# Altium PCB MD1800_5V800mA.PcbDoc
Units mm, origin at the board's own origin, x right, y up, seen from the top; angles counter-clockwise.
Board outline 63.25 x 38.25 mm, 2 copper layers (Top Layer, Bottom Layer); 39 components, 30 nets, 113 pads, 7 vias.
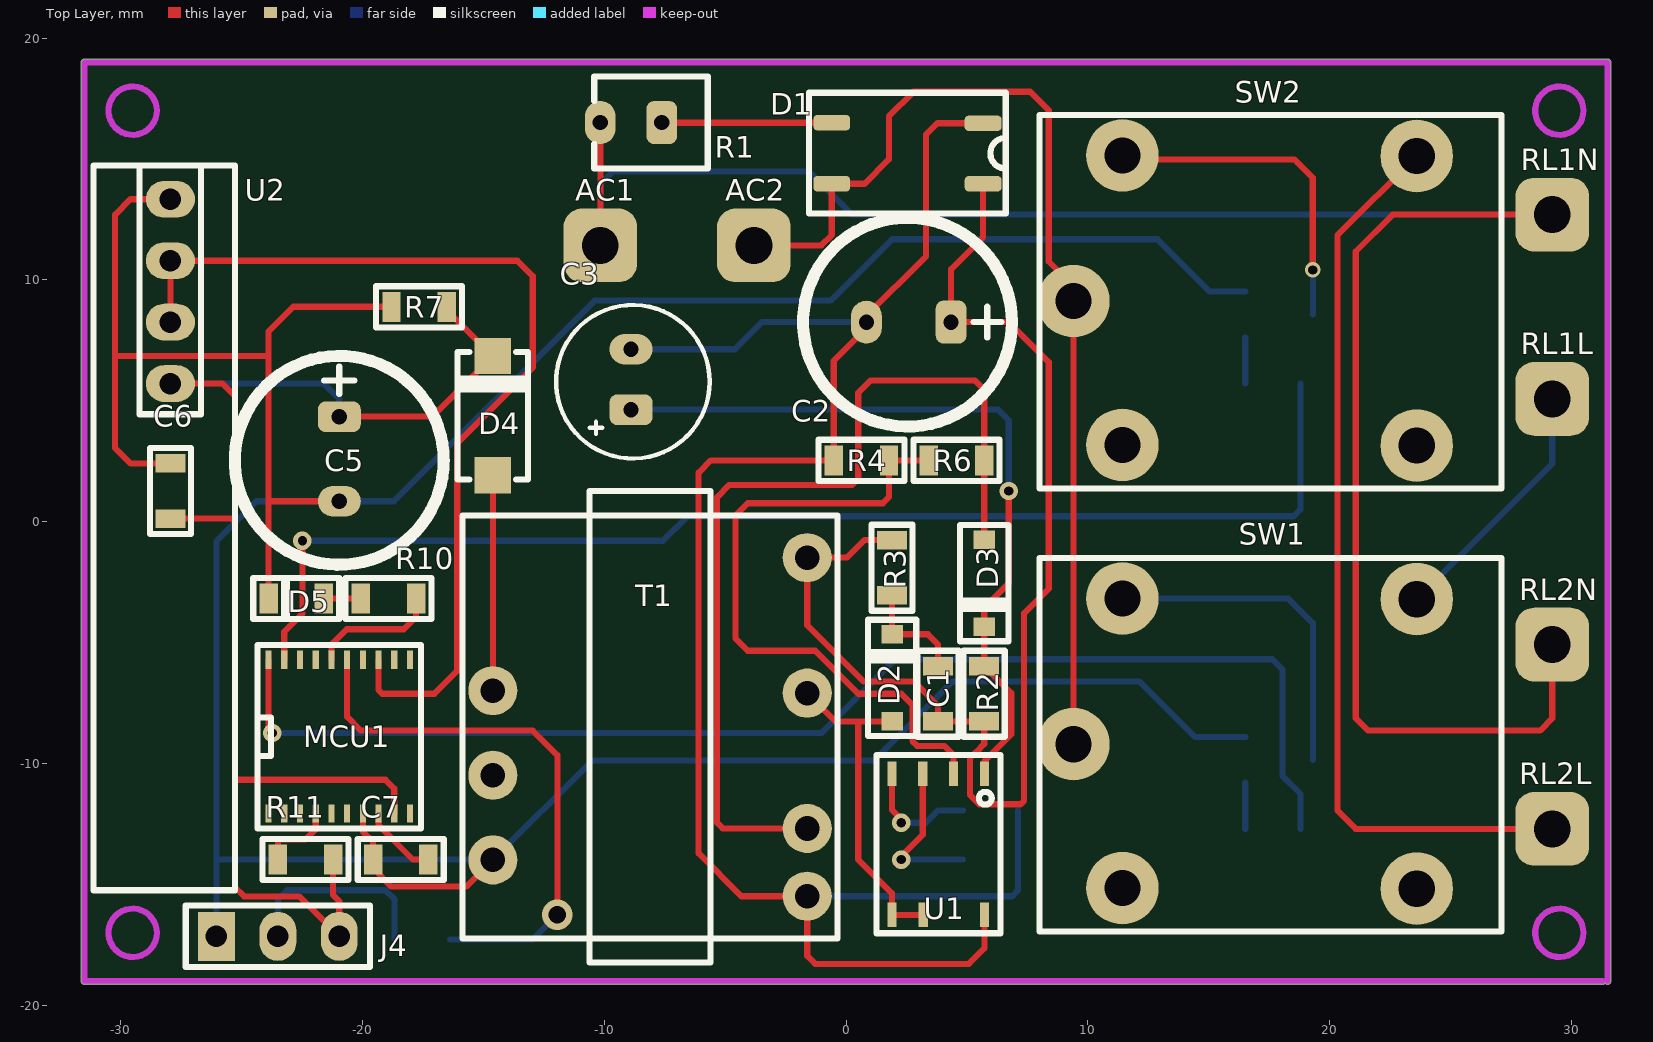
[diagram p0: Top Layer view]
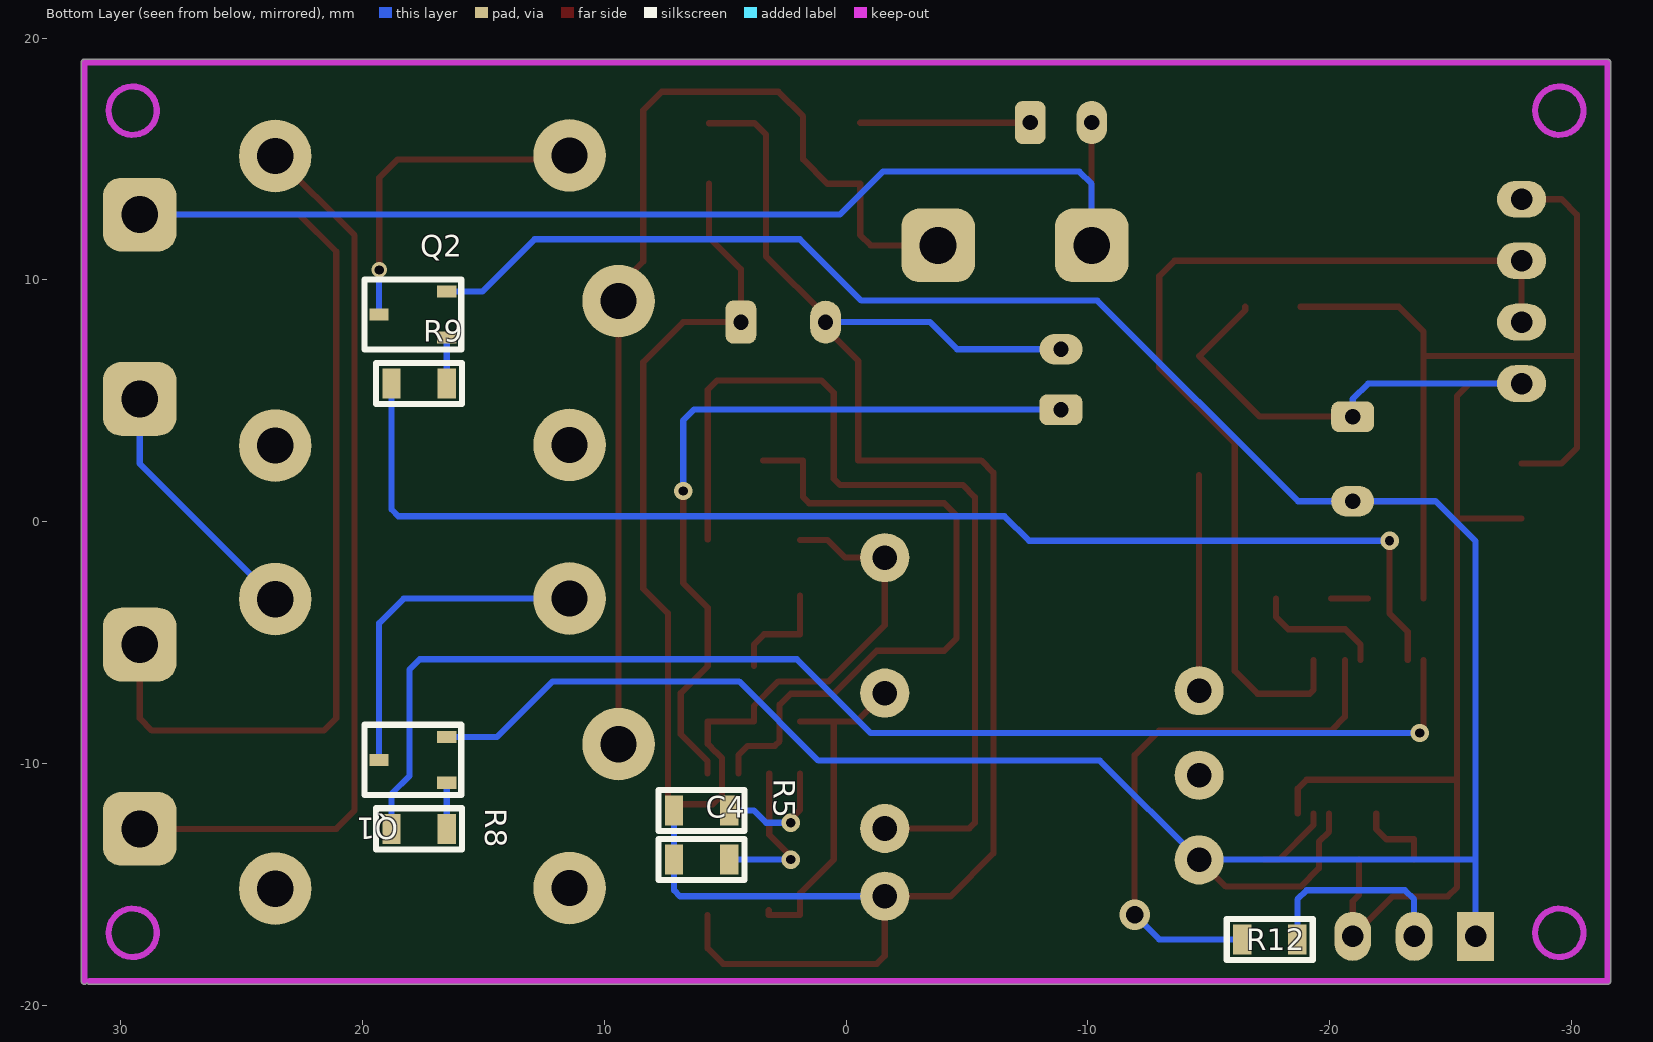
[diagram p1: Bottom Layer view, seen from below]

## Layer stack, top to bottom
Top Solder: solder mask 0.0102, Solder Resist, Dk 3.5
Top Layer: signal copper 0.0356
Dielectric 1: dielectric 0.32, FR-4, Dk 4.8
Bottom Layer: signal copper 0.0356
Bottom Solder: solder mask 0.0102, Solder Resist, Dk 3.5

## Board outline
-31.627,-19 ccw(c-31.5,-19) -31.5,-19.127 31.292,-19.127 ccw(c31.292,-19) 31.394,-19.076 ccw(c31.496,-19) 31.588,-19.088 ccw(c31.5,-18.996) 31.627,-18.996 31.627,19 ccw(c31.5,19) 31.475,19.125 ccw(c31.45,19) 31.45,19.127 -31.5,19.127 ccw(c-31.5,19) -31.627,19

## Design rules (kind name [scope] priority, off if disabled: settings)
Clearance [All] p1: gap=0.254 ignorepadtopadclearanceinfootprint=FALSE except(0: Arc-Hole Track-Hole SMDPad-Hole THPad-Hole Via-Hole Fill-Hole Poly-Hole Region-Hole Text-Hole)
PolygonConnect [All] p1: connectstyle=Relief reliefconductorwidth=0.254 reliefentries=4 polygonreliefangle="90 Angle" airgapwidth=0.254
RoutingVias [All] p1: holewidth=0.711 width=1.27 viastyle="Through Hole" minholewidth=0.711 minwidth=1.27 maxholewidth=0.711 maxwidth=1.27
SolderMaskExpansion [All] p1: expansion=0.102 istentingtop=FALSE
Width [All] p1: maxlimit=0.254 minlimit=0.254 preferedwidth=0.254
30 further rules are at their usual default settings.

## Components (designator, comment, footprint, x,y, rotation, side; value= is the part's Value field where it differs from the comment)
AC1 "AC" SolderPoint -10.16,11.43 r90 top
AC2 "AC" SolderPoint -3.81,11.43 r0 top
C1 "102/1kV" C0805 3.81,-7.112 r270 top
C2 "4.7/400V" CAP_RAD_3.5mm 2.54,8.255 r180 top
C3 "10uF/16V" CAP_RAD_2.5mm -8.815,5.79 r90 top
C4 "104" C0805 5.969,-13.97 r0 bottom
C5 "470uF/10V" CAP_RAD_3.5mm -20.955,2.54 r270 top
C6 "105" C0805 -27.94,1.27 r270 top
C7 "105" C0805 -18.415,-13.97 r0 top
D1 "MB10F" MB10F-TMBS 2.54,15.24 r0 top
D2 "1N4007" SOD-123FL 1.905,-6.455 r90 top
D3 "FR107" SOD-123FL 5.715,-2.54 r270 top
D4 "SB240" DO-214AC(SMA) -14.605,6.35 r270 top
D5 "LED0805" L0805RED -22.733,-3.175 r180 top
J4 "UPDATE_CODE" "Header 3x1 TH Pitch 2.54mm" -23.495,-17.145 r0 top
MCU1 "STM8S003F3P6" TSSOP20_0.65_4.4 -20.955,-8.89 r90 top
Q1 "2SC1815" SOT23-3 17.91,-9.845 r90 bottom
Q2 "2SC1815" SOT23-3 17.91,8.57 r90 bottom
R1 "10R/1W" RES-1W-V-MF -7.62,16.51 r180 top
R2 "3M" R0805 5.715,-7.112 r270 top
R3 "200K" R0805 1.905,-1.905 r90 top
R4 "33K" R0805 4.572,2.54 r0 top
R5 "1.5R" R0805 5.969,-11.938 r180 bottom
R6 "30K" R0805 0.635,2.54 r0 top
R7 "1K" R0805 -17.653,8.89 r0 top
R8 "10k" R0805 17.653,-12.7 r180 bottom
R9 "10k" R0805 17.653,5.715 r180 bottom
R10 "10k" R0805 -18.923,-3.175 r0 top
R11 "10k" R0805 -22.352,-13.97 r0 top
R12 "10k" R0805 -17.526,-17.272 r180 bottom
RL1L "AC" SolderPoint 29.21,5.08 r0 top
RL1N "AC" SolderPoint 29.21,12.7 r0 top
RL2L "AC" SolderPoint 29.21,-12.7 r0 top
RL2N "AC" SolderPoint 29.21,-5.08 r0 top
SW1 "RELAY_10A" RELAY_10A_5PIN 17.655,-9.075 r0 top
SW2 "RELAY_10A" RELAY_10A_5PIN 17.655,9.25 r0 top
T1 "EE13 (5+5)" TRANS_EE19F -8.105,-8.485 r270 top
U1 "MD1801" SOIC-7 3.81,-13.335 r270 top
U2 "RF433_315_RECEVICE" RF433_315_RECEVICE -27.94,0.635 r90 top

## Footprints (in the part's own frame and the unit in brackets; to place one, negate y for a bottom-side part, rotate by r counter-clockwise, add the part's x,y. Pads: shape width x height; smd on the part's side, far side on the other; paste and mask are expansions set on the pad)
C0805 [mil]
  rect 30x48.82 smd: 1(-45,0) 2(45,0)
  silkscreen extent -70,-33 70,33, body extent -39,-24 39,24, height 39
CAP_RAD_2.5mm [mm]
  rrect50% 1.27x1.778 hole 0.635: 1(-1.155,0.075)
  oval 1.27x1.778 hole 0.635: 2(1.345,0.075)
  silkscreen extent -3.17,-3.17 3.17,3.17, body extent -3.07,-3.07 3.23,3.23, height 11.02
CAP_RAD_3.5mm [mil]
  rrect50% 50x70 hole 25: 1(-71.06,0)
  oval 50x70 hole 25: 2(66.73,0)
  silkscreen extent -170,-170 170,170, body extent -160,-157 155,157, height 446
DO-214AC(SMA) [mm]
  rect 1.5x1.5 smd: 1(4.43,0) 2(-0.5,0)
  silkscreen extent -0.67,-1.5 4.61,1.5, body extent -0.67,-1.46 4.61,1.46, height 2.41
"Header 3x1 TH Pitch 2.54mm" [mil]
  rect 60x80 hole 35: 1(-100,0)
  oval 60x80 hole 35: 2(0,0) 3(100,0)
  silkscreen extent -150,-50 150,50, body extent -150,-50 150,50, height 350
L0805RED [mil]
  rect 30x48.82 smd: 1(-45,0) 2(45,0)
  silkscreen extent -70,-35 70,35, body extent -39,-25 39,25, height 43
MB10F-TMBS [mil]
  rrect50% 60x25 smd: 1(-123.28,49.7) 2(-123.28,-49.7) 3(123.28,-49.7) 4(123.28,48.72)
  silkscreen extent -160,-98 160,98, body extent -134,-97 134,96, height 63
R0805 [mil]
  rect 30x48.82 smd: 1(-45,0) 2(45,0)
  silkscreen extent -70,-33 70,33, body extent -39,-25 40,25, height 18
RELAY_10A_5PIN [mm]
  round 3 hole 1.5: 1(-6.225,5.9) 2(-8.25,-0.125) 3(-6.225,-6.075) 4(5.95,-6.1) 5(5.95,5.875)
  silkscreen extent -9.65,-7.87 9.45,7.57, body extent -9.65,-7.88 9.45,7.62, height 15.3
RES-1W-V-MF [mil]
  rrect50% 50x70 hole 25: 1(0,0)
  oval 50x70 hole 25: 2(100,0)
  silkscreen extent -75,-75 110,75, body extent -75,-75 112,75, height 569
RF433_315_RECEVICE [mil]
  oval 60x80 hole 35: 1(200,0) 2(300,0) 3(400,0) 4(500,0)
  silkscreen extent -625,-105 555,125, body extent -626,-105 555,167, height 472
SOD-123FL [mil]
  rect 30x35 smd: 1(-70.87,0) 2(70.87,0)
  silkscreen extent -94,-39 94,39, body extent -71,-32 71,32, height 37
SOIC-7 [mil]
  rect 40x15 smd: 1(-115,75.3) 2(-115,25.1) 3(-115,-25.1) 4(-115,-75.3) 5(115,-75.3) 6(115,-24.11) 8(115,75.3)
  silkscreen extent -145,-101 145,101, body extent -118,-96 118,96, height 69
SolderPoint [mil]
  rrect50% 120x120 hole 60: 1(0,0)
SOT23-3 [mm]
  rect 0.5x0.8 smd: 1(-0.95,-1.4) 2(0.95,-1.4) 3(0,1.4)
  silkscreen extent -1.45,-2 1.45,2, body extent -1.45,-1.4 1.45,1.4, height 1.3
TRANS_EE19F [mil]
  round 80 hole 40: 1(275.59,255.91) 2(165.35,255.91) 4(-55.12,255.91) 6(-275.59,255.91) 7(216.53,-255.91) 8(78.74,-255.91) 9(-59.06,-255.91)
  silkscreen extent -384,-305 384,305
TSSOP20_0.65_4.4 [mil]
  rect 30x10 smd: 1(-125,115.16) 2(-125,89.57) 3(-125,63.98) 4(-125,38.39) 5(-125,12.8) 6(-125,-12.8) 7(-125,-38.39) 8(-125,-63.98) 9(-125,-89.57) 10(-125,-115.16) 11(125,-115.16) 12(125,-89.57) 13(125,-63.98) 14(125,-38.39) 15(125,-12.8) 16(125,12.8) 17(125,38.39) 18(125,63.98) 19(125,89.57) 20(125,115.16)
  silkscreen extent -150,-133 150,133, body extent -124,-128 124,128, height 43

## Part data
AC1 AC2 RL1L RL1N RL2L RL2N: library part SolderPoint
C1 C4 C6 C7: library part C0805
C2 C3 C5: library part Capacitor(Radian)
D1: "1A 1000V"
D2 D3: library part "Diode FR107", "1A 1000V"
D4: library part "Diode Schottky"
J4: library part "Header 3x1 TH Pitch 2.54mm"
Q1 Q2: library part "2SC1815 (SOT-23)"
R1: library part "Resistors THD"
R2 R3 R4 R5 R6 R7 R8 R9 R10 R11 R12: library part "Resistor SMD"
T1: library part Trans-EE19F
U1: "Power Switching IC"
U2: library part RF433_315

## Via types
v1: diameter 0.762, hole 0.381, Top Layer to Bottom Layer, 5 vias
v2: diameter 1.27, hole 0.711, Top Layer to Bottom Layer, 1 vias
v3: diameter 0.635, hole 0.381, Top Layer to Bottom Layer, 1 vias

## Nets (pads, with @x,y where several pads share a name; then routed paths per layer and width w, separated by ;. In a path a pad name is that pad's centre, name@x,y a point inside that pad or via, vN(x,y) a via of type N, cw(c..) or ccw(c..) an arc to the next point about the centre after c; other vN are vias at no path point)
GND: C5.2 C6.1 C7.1 D5.2 J4.1 MCU1.7 Q1.2 Q2.2 R7.1 T1.7 U2.4 | length 160.2
  Top Layer w0.254: C6.1 -29.591,2.413 -30.226,3.048 -30.226,6.858 ; U2.4 -29.591,13.335 -30.226,12.7 -30.226,6.858 ; D5.2 -23.876,0.845 ; C5.2 -23.876,0.845 ; MCU1.7 -19.98,-12.811 -19.558,-13.233 C7.1 -19.558,-14.336 -18.807,-15.088 -15.708,-15.088 T1.7 ; R7.1 -22.86,8.89 -23.876,7.874 -23.876,6.858 ; -30.226,6.858 -23.876,6.858 ; -23.876,0.845 -23.876,6.858
  Bottom Layer w0.254: J4.1 -26.035,-15.24 -26.035,-13.97 ; Q1.2 14.427,-8.895 12.136,-6.604 4.42,-6.604 1.143,-9.881 -10.501,-9.881 T1.7 -14.62,-13.97 -26.035,-13.97 ; Q2.2 15.042,9.52 12.878,11.684 1.905,11.684 -0.635,9.144 -10.395,9.144 -18.694,0.845 C5.2 -24.384,0.845 -26.035,-0.806 -26.035,-13.97
NetAC1_1: AC1.1 R1.2 RL1N.1 RL2N.1 | length 87.6
  Top Layer w0.254: AC1.1 R1.2 ; RL2N.1 29.21,-8.128 28.702,-8.636 21.59,-8.636 21.082,-8.128 21.082,11.176 22.606,12.7 RL1N.1
  Bottom Layer w0.254: AC1.1 -10.16,13.97 -9.652,14.478 -1.524,14.478 0.254,12.7 RL1N.1
NetAC2_1: AC2.1 D1.2 SW1.2 SW2.2 | length 44.1
  Top Layer w0.254: AC2.1 -1.016,11.43 -0.591,11.855 D1.2 0.77,13.978 1.778,14.986 1.778,16.764 2.794,17.78 7.62,17.78 8.382,17.018 8.382,10.762 9.405,9.739 SW2.2 SW1.2
NetC1_1: C1.1 D2.2 R3.1 | length 4.6
  Top Layer w0.254: R3.1 D2.2 3.385,-4.655 3.81,-5.08 C1.1
NetC1_2: C1.2 C2.1 D1.3 R2.2 R3.2 T1.6 | length 51.2
  Top Layer w0.254: R3.2 0.762,-0.762 0.039,-1.485 T1.6 -1.605,-4.281 0.718,-6.604 2.794,-6.604 3.81,-7.62 C1.2 R2.2 5.715,-9.188 5.378,-9.525 5.374,-9.525 5.131,-9.768 5.131,-11.303 5.512,-11.684 7.217,-11.684 7.366,-11.535 7.366,-3.785 8.382,-2.769 8.382,6.604 6.731,8.255 C2.1 4.345,10.439 5.671,11.766 D1.3
NetC2_2: C2.2 C3.2 C4.2 D1.4 R5.1 R6.1 T1.1 U1.8 | length 78.3
  Top Layer w0.254: D1.4 3.777,16.477 3.302,16.002 3.302,10.966 0.845,8.509 C2.2 0.845,8.001 -0.508,6.648 R6.1 -5.588,2.54 -6.096,2.032 -6.096,-13.716 -4.327,-15.485 T1.1 -1.605,-17.953 -1.27,-18.288 5.08,-18.288 5.723,-17.645 U1.8
  Bottom Layer w0.254: C3.2 -4.597,7.135 -3.477,8.255 C2.2 ; T1.1 6.867,-15.485 7.112,-15.24 C4.2 R5.1
NetC3_1: C3.1 D3.2 R2.1 U1.1 | length 31.8
  Top Layer w0.254: U1.1 5.723,-9.898 6.833,-8.788 6.833,-7.087 R2.1 D3.2 5.715,-3.556 6.731,-2.54 v1(6.731,1.27)
  Bottom Layer w0.254: C3.1 6.287,4.635 6.731,4.191 v1(6.731,1.27)
NetC4_1: C4.1 U1.3 | length 6.5
  Top Layer w0.254: v1(2.286,-13.97) 2.286,-13.836 3.175,-12.947 3.175,-10.416 U1.3
  Bottom Layer w0.254: v1(2.286,-13.97) C4.1
NetC7_2: C7.2 MCU1.8 | length 3.1
  Top Layer w0.254: MCU1.8 -19.33,-12.547 -17.907,-13.97 C7.2
NetD1_1: D1.1 R1.1 | length 7
  Top Layer w0.254: R1.1 -7.62,16.502 D1.1
NetD2_1: D2.1 T1.4 U1.5 U1.6 | length 14.1
  Top Layer w0.254: T1.4 -0.435,-8.255 0.508,-8.255 ; D2.1 0.508,-8.255 ; U1.6@3.198,-16.066 U1.6 U1.5 1.897,-16.066 1.897,-15.359 0.508,-13.97 0.508,-8.255
NetD3_1: D3.1 R4.2 T1.2 | length 38.8
  Top Layer w0.254: T1.2 -5.095,-12.685 -5.334,-12.446 -5.334,1.016 -4.826,1.524 0.254,1.524 0.508,1.778 0.508,5.334 1.016,5.842 5.334,5.842 5.715,5.461 R4.2 D3.1
NetD4_1: D4.1 T1.9 | length 8.9
  Top Layer w0.254: T1.9 D4.1
NetD5_1: D5.1 R10.1 | length 1.5
  Top Layer w0.254: D5.1 R10.1
NetJ4_2: J4.2 R12.2 | length 8.3
  Bottom Layer w0.254: J4.2 -23.495,-15.621 -23.114,-15.24 -19.05,-15.24 -18.669,-15.621 R12.2
NetMCU1_4: MCU1.4 R11.1 | length 3.2
  Top Layer w0.254: R11.1 -23.495,-13.132 -22.352,-13.132 -21.93,-12.71 MCU1.4
NetMCU1_13: MCU1.13 U2.2 U2.3 | length 40.4
  Top Layer w0.254: U2.2 U2.3 -13.589,10.795 -12.954,10.16 -12.954,6.375 -16.078,3.251 -16.078,-6.172 -17.018,-7.112 -19.181,-7.112 -19.33,-6.963 MCU1.13
NetMCU1_15: MCU1.15 R12.1 | length 23.2
  Top Layer w0.254: MCU1.15 -20.63,-8.072 -20.066,-8.636 -12.954,-8.636 -11.938,-9.652 v2(-11.938,-16.256)
  Bottom Layer w0.254: R12.1 -12.954,-17.272 v2(-11.938,-16.256)
NetMCU1_16: MCU1.16 R10.2 | length 5.4
  Top Layer w0.254: MCU1.16 -21.28,-5.08 -20.645,-4.445 -18.288,-4.445 -17.78,-3.937 R10.2
NetMCU1_19: MCU1.19 R9.1 | length 52.3
  Top Layer w0.254: MCU1.19 -23.23,-4.547 -22.479,-3.796 v1(-22.479,-0.787)
  Bottom Layer w0.254: v1(-22.479,-0.787) -7.569,-0.787 -6.552,0.229 18.517,0.229 18.796,0.508 R9.1
NetMCU1_20: MCU1.20 R8.1 | length 53.2
  Top Layer w0.254: MCU1.20 -23.88,-8.581 v1(-23.724,-8.738)
  Bottom Layer w0.254: v1(-23.724,-8.738) -1.016,-8.738 2.032,-5.69 17.628,-5.69 18.047,-6.109 18.047,-10.503 18.796,-11.252 R8.1
NetQ1_1: Q1.1 R8.2 | length 1.9
  Bottom Layer w0.254: R8.2 Q1.1
NetQ1_3: Q1.3 SW1.1 | length 14
  Bottom Layer w0.254: SW1.1 18.288,-3.175 19.31,-4.197 Q1.3
NetQ2_1: Q2.1 R9.2 | length 1.9
  Bottom Layer w0.254: R9.2 Q2.1
NetQ2_3: Q2.3 SW2.1 | length 13.9
  Top Layer w0.254: SW2.1 11.594,14.986 18.542,14.986 19.304,14.224 v3(19.304,10.414)
  Bottom Layer w0.254: v3(19.304,10.414) 19.31,10.408 Q2.3
NetR4_1: R4.1 R6.2 U1.2 | length 27.6
  Top Layer w0.254: R4.1 R6.2 1.778,1.016 1.524,0.762 -4.064,0.762 -4.572,0.254 -4.572,-4.826 -4.064,-5.334 -1.27,-5.334 0.508,-7.112 2.286,-7.112 2.743,-7.569 2.743,-9.068 2.946,-9.271 4.066,-9.271 4.447,-9.652 U1.2
NetR5_2: R5.2 U1.4 | length 4.9
  Top Layer w0.254: U1.4 1.897,-11.92 2.286,-12.309 v1(2.286,-12.446)
  Bottom Layer w0.254: v1(2.286,-12.446) 3.302,-12.446 3.81,-11.938 R5.2
NetRL1L_1: RL1L.1 SW1.5 | length 10.6
  Bottom Layer w0.254: SW1.5 29.21,2.405 RL1L.1
NetRL2L_1: RL2L.1 SW2.5 | length 37.6
  Top Layer w0.254: SW2.5 20.32,11.84 20.32,-11.938 21.082,-12.7 RL2L.1
VCC: C5.1 C6.2 D4.2 J4.3 MCU1.9 R7.2 R11.2 U2.1 | length 60.3
  Top Layer w0.254: C6.2 -25.4,0.127 -25.273,0 ; U2.1 -25.781,5.715 -25.273,5.207 -25.273,0 ; R11.2 -21.209,-15.443 -20.955,-15.697 J4.3 -22.606,-15.494 -24.892,-15.494 -25.273,-15.113 -25.273,-10.668 ; C5.1 -17.11,4.345 D4.2 -16.51,8.755 R7.2 ; MCU1.9 -18.68,-11.038 -19.05,-10.668 -25.273,-10.668 ; -25.273,-10.668 -25.273,0
  Bottom Layer w0.254: U2.1 -21.59,5.715 -20.955,5.08 C5.1
pads on no net: MCU1.1 MCU1.2 MCU1.3 MCU1.5 MCU1.6 MCU1.10 MCU1.11 MCU1.12 MCU1.14 MCU1.17 MCU1.18 SW1.3 SW1.4 SW2.3 SW2.4 T1.8

## Keep-outs
Keep-Out Layer:
  circle w0.254: c-29.5,-17 r1
  circle w0.254: c-29.5,17 r1
  circle w0.254: c29.5,-17 r1
  circle w0.254: c29.5,17 r1
  lines w0.254: 31.292,-19 -31.5,-19 -31.5,19 31.45,19 ; 31.496,-19 31.496,-18.796 31.5,-18.796 ; 31.5,-18.996 31.5,19